# EAGLE board power-v3 (EAGLE 5.11)
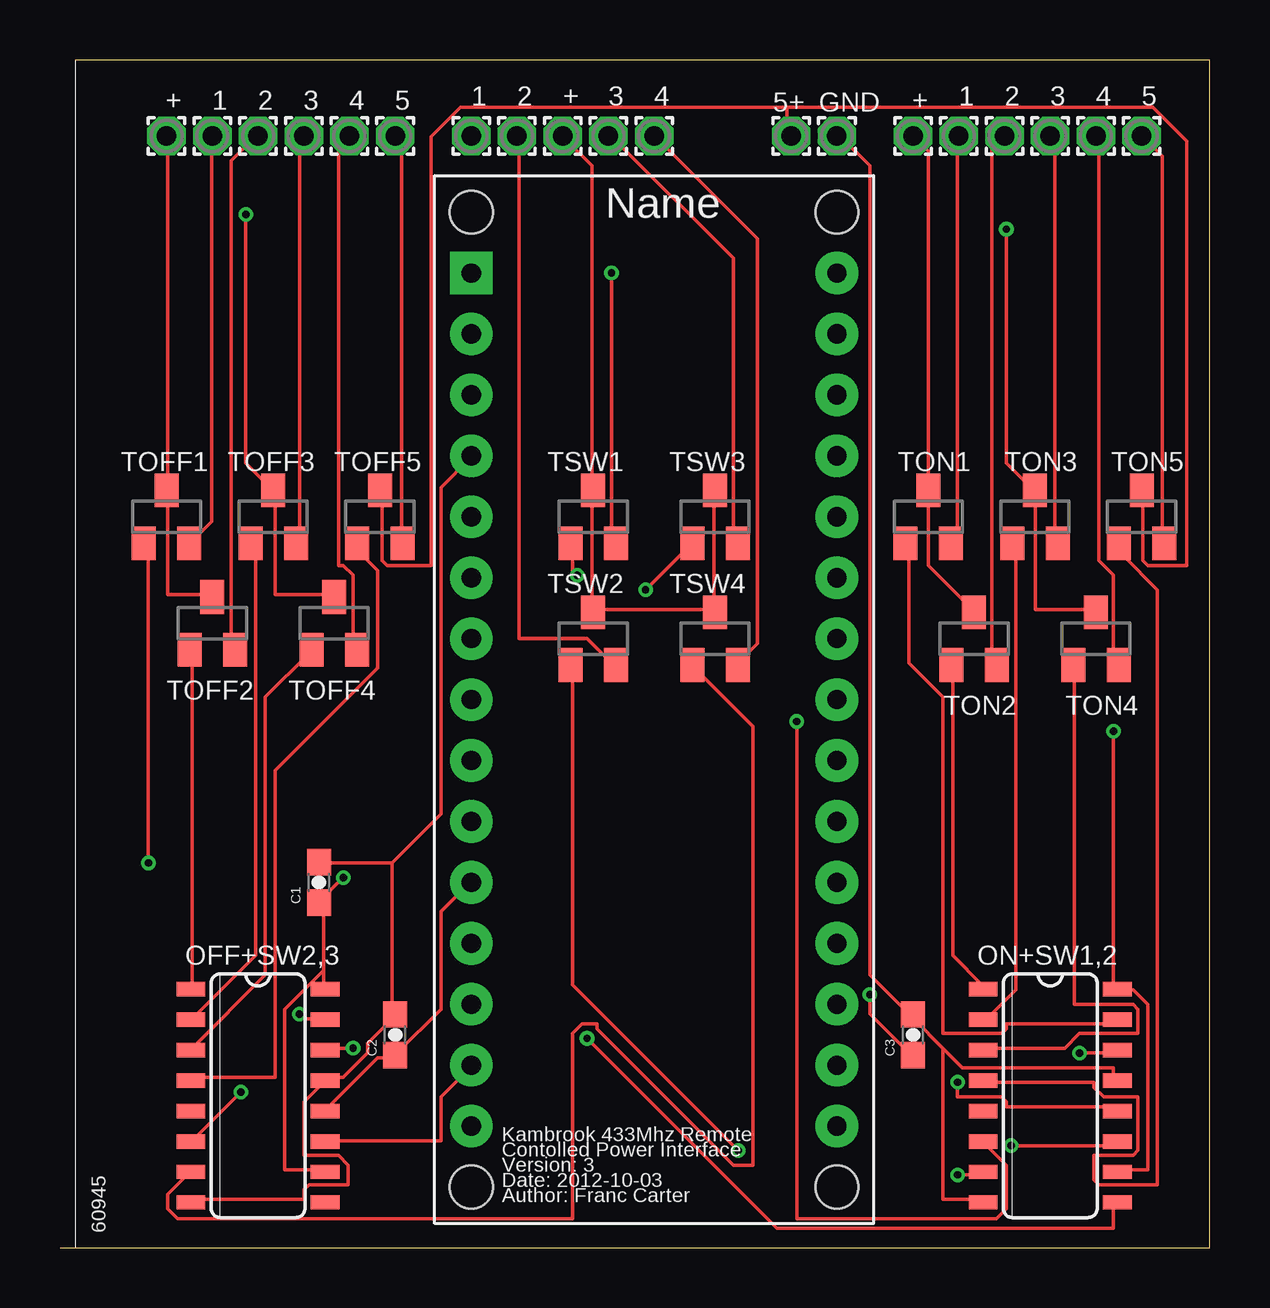
[diagram p0: board, top side]
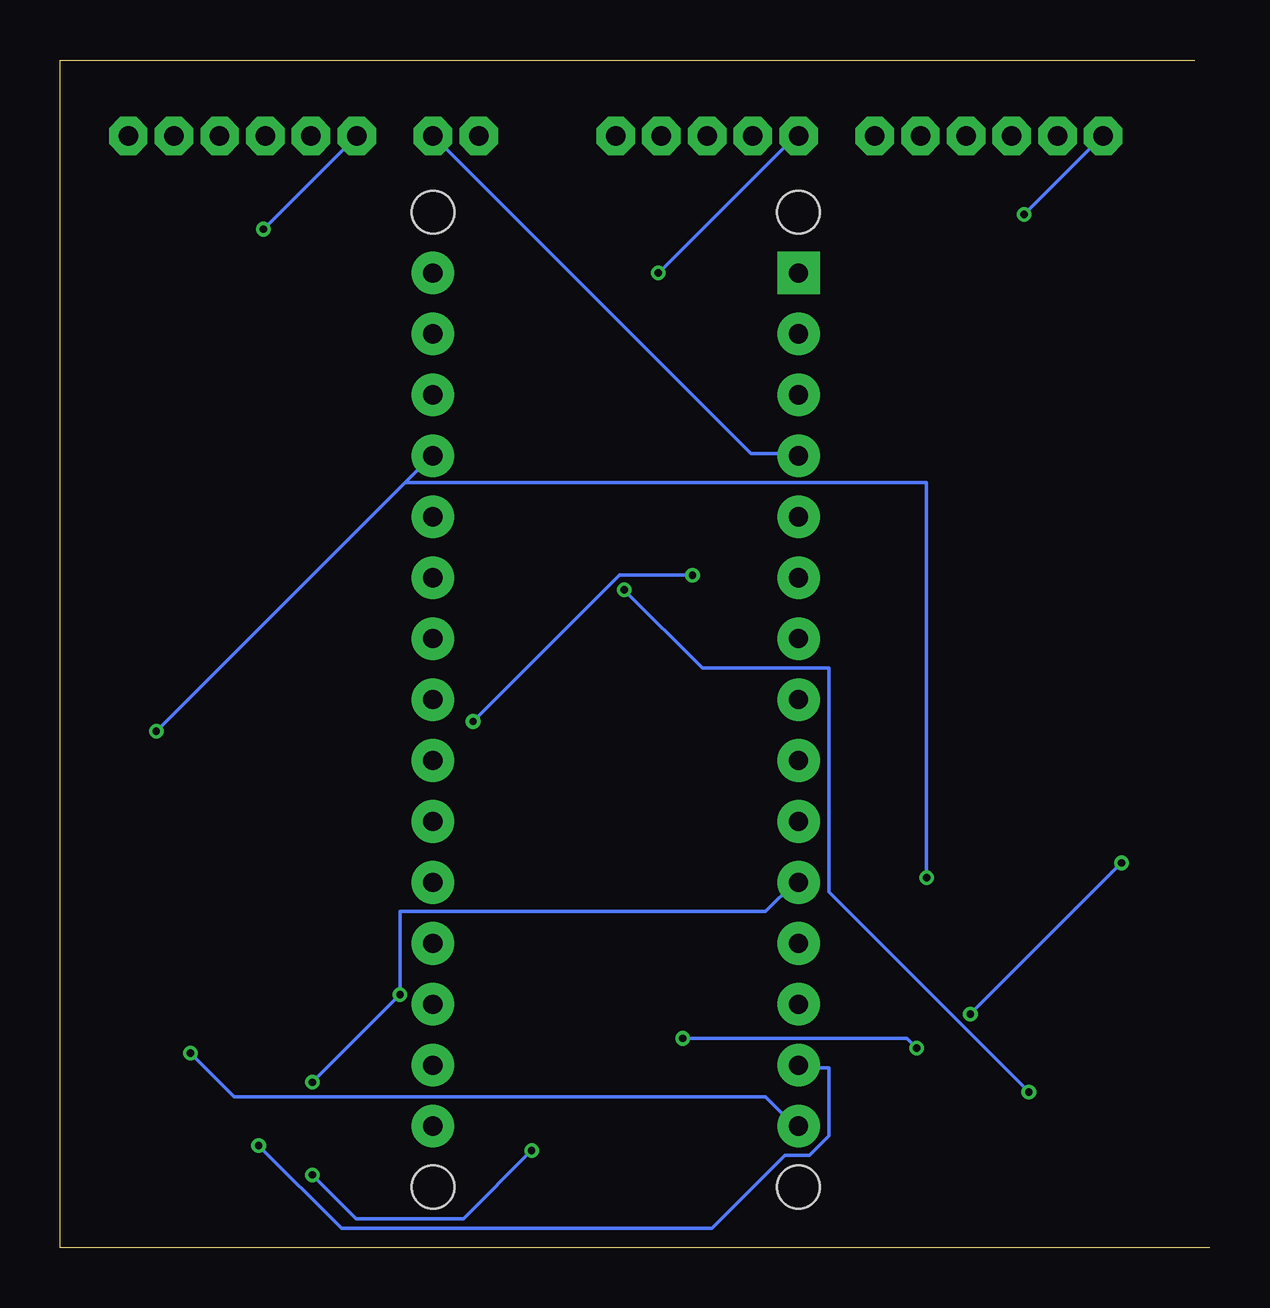
[diagram p1: board, bottom side, seen from below]

Size 47.93 x 49.52 mm. Coordinates in mm from the lower left corner, seen from the top.
Outline: 0,0 47.93,0 47.93,49.52 0.64,49.52
Copper layers (1*16): Top 0.035mm / dielectric 1.5mm / Bottom 0.035mm
Design rules "Fusion_eagle_rule_v1.1": minimum track width 6mil, minimum drill 12mil, track to track 6mil, track to pad 6mil, pad to pad 6mil, via to via 6mil, smd to smd 0mil, copper to edge 10mil, drill to drill 10mil, minimum pad ring 10mil, minimum via ring 6mil, stop-mask expansion 2mil, vias tented up to drill 100mil, thermal gap 10mil

## Footprints (pad centres in the part's own frame; a part is rotated, then mirrored left to right if it is on the bottom)
1,6/0,8 = drill 0.813 pad 1.6 octagon: 1 0,0
0603-CAP = smd 1.1 x 1: 1 -0.85,0; 2 0.85,0
PDIP-32 = drill 0.8 pad 1.778 round: 3V3 15.24,-35.56; +5V 15.24,-10.16; A0 15.24,-12.7; A1 15.24,-15.24; A2 15.24,-17.78; A3 15.24,-20.32; A4 15.24,-22.86; A5 15.24,-25.4; A6 15.24,-27.94; A7 15.24,-30.48; AREF 15.24,-33.02; D0/RX 0,-5.08; D2 0,-12.7; D3 0,-15.24; D4 0,-17.78; D5 0,-20.32; D6 0,-22.86; D7 0,-25.4; D8 0,-27.94; D9 0,-30.48; D10 0,-33.02; D11 0,-35.56; D12 0,-38.1; D13 15.24,-38.1; GND 0,-10.16; GND1 15.24,-5.08; RESET 0,-7.62; RESET1 15.24,-7.62; VIN 15.24,-2.54 | drill 0.8 pad 1.778 square: D1/TX 0,-2.54 | hole 1.778: 0,0; 0,-40.64; 15.24,-40.64; 15.24,0
SO16 = smd 0.6 x 1.2: 1 -4.445,-2.8; 2 -3.175,-2.8; 3 -1.905,-2.8; 4 -0.635,-2.8; 5 0.635,-2.8; 6 1.905,-2.8; 7 3.175,-2.8; 8 4.445,-2.8; 9 4.445,2.8; 10 3.175,2.8; 11 1.905,2.8; 12 0.635,2.8; 13 -0.635,2.8; 14 -1.905,2.8; 15 -3.175,2.8; 16 -4.445,2.8
SOT23 = smd 1 x 1.4: 1 -0.95,-1.1; 2 0.95,-1.1; 3 0,1.1

## Placement (x,y rotation side)
5+  [1,6/0,8]  30.48,46.35 0 top
C1  0.01uf  [0603-CAP]  10.79,15.24 90 top
C2  0.01uf  [0603-CAP]  13.97,8.89 90 top
C3  0.01uf  [0603-CAP]  35.56,8.89 90 top
GND  [1,6/0,8]  32.38,46.35 0 top
NANO  ARDUINONANO  [PDIP-32]  17.15,43.18 0 top
OFF1  [1,6/0,8]  6.35,46.35 0 top
OFF2  [1,6/0,8]  8.26,46.35 0 top
OFF3  [1,6/0,8]  10.16,46.35 0 top
OFF4  [1,6/0,8]  12.06,46.35 0 top
OFF5-  [1,6/0,8]  13.97,46.35 0 top
OFF+  [1,6/0,8]  4.45,46.35 0 top
OFF+SW2,3  74LS595D  [SO16]  8.26,6.35 270 top
ON1  [1,6/0,8]  37.46,46.35 0 top
ON2  [1,6/0,8]  39.37,46.35 0 top
ON3  [1,6/0,8]  41.27,46.35 0 top
ON4  [1,6/0,8]  43.18,46.35 0 top
ON5-  [1,6/0,8]  45.09,46.35 0 top
ON+  [1,6/0,8]  35.56,46.35 90 top
ON+SW1,2  74LS595D  [SO16]  41.27,6.35 270 top
SW1  [1,6/0,8]  17.15,46.35 0 top
SW2  [1,6/0,8]  19.05,46.35 0 top
SW3  [1,6/0,8]  22.86,46.35 0 top
SW4  [1,6/0,8]  24.77,46.35 0 top
SW+  [1,6/0,8]  20.96,46.35 0 top
TOFF1  [SOT23]  4.45,30.48 0 top
TOFF2  [SOT23]  6.35,26.04 0 top
TOFF3  [SOT23]  8.89,30.48 0 top
TOFF4  [SOT23]  11.43,26.04 0 top
TOFF5  [SOT23]  13.33,30.48 0 top
TON1  [SOT23]  36.2,30.48 0 top
TON2  [SOT23]  38.1,25.4 0 top
TON3  [SOT23]  40.64,30.48 0 top
TON4  [SOT23]  43.18,25.4 0 top
TON5  [SOT23]  45.09,30.48 0 top
TSW1  [SOT23]  22.23,30.48 0 top
TSW2  [SOT23]  22.23,25.4 0 top
TSW3  [SOT23]  27.31,30.48 0 top
TSW4  [SOT23]  27.31,25.4 0 top

## Library data of the parts
5+ GND OFF1-OFF4 OFF5- OFF+ ON1-ON4 ON5- ON+ SW1-SW4 SW+ = wirepad
C1-C3 OFF+SW2,3 ON+SW1,2 = SparkFun
NANO = MyNano
TOFF1-TOFF5 TON1-TON5 TSW1-TSW4 = semicon-smd-ipc

## Nets
CLK: NANO.D11 OFF+SW2,3.11 ON+SW1,2.11
CRY: OFF+SW2,3.14 ON+SW1,2.9
DATA: NANO.D12 ON+SW1,2.14
GND: C1.2 C2.2 C3.2 GND.1 NANO.GND OFF+SW2,3.8 OFF+SW2,3.13 ON+SW1,2.8 ON+SW1,2.13
LTCH: C2.1 C3.1 NANO.D8 OFF+SW2,3.12 ON+SW1,2.12
N$1: ON+.1 TON1.3 TON2.3 TON3.3 TON4.3
N$2: ON4.1 TON4.2
N$3: ON3.1 TON3.2
N$4: ON2.1 TON2.2
N$5: 5+.1 TOFF5.3 TON5.3
N$6: ON1.1 TON1.2
N$7: SW+.1 TSW1.3 TSW2.3 TSW3.3 TSW4.3
N$8: SW1.1 TSW1.2
N$9: SW2.1 TSW2.2
N$10: SW3.1 TSW3.2
N$11: ON5-.1 TON5.2
N$12: SW4.1 TSW4.2
N$21: OFF+.1 TOFF1.3 TOFF2.3 TOFF3.3 TOFF4.3
N$22: OFF1.1 TOFF1.2
N$23: OFF4.1 TOFF4.2
N$24: OFF3.1 TOFF3.2
N$25: OFF2.1 TOFF2.2
N$31: OFF5-.1 TOFF5.2
N$38: ON+SW1,2.5
N$46: OFF+SW2,3.5
N$49: OFF+SW2,3.9
OFF1: OFF+SW2,3.15 TOFF1.1
OFF2: OFF+SW2,3.1 TOFF2.1
OFF3: OFF+SW2,3.2 TOFF3.1
OFF4: OFF+SW2,3.3 TOFF4.1
OFF5: OFF+SW2,3.4 TOFF5.1
ON1: ON+SW1,2.15 TON1.1
ON2: ON+SW1,2.1 TON2.1
ON3: ON+SW1,2.2 TON3.1
ON4: ON+SW1,2.3 TON4.1
ON5: ON+SW1,2.4 TON5.1
SW1: ON+SW1,2.6 TSW1.1
SW2: ON+SW1,2.7 TSW2.1
SW3: OFF+SW2,3.6 TSW3.1
SW4: OFF+SW2,3.7 TSW4.1
VCC: C1.1 NANO.+5V OFF+SW2,3.10 OFF+SW2,3.16 ON+SW1,2.10 ON+SW1,2.16

## Tracks (layer width: path | path; a pad name or v marks a point on that pad's centre or on a via)
CLK  (via drill 0.3)
  Top 0.152: OFF+SW2,3.11 11.2,4.47 15.88,4.47 15.88,6.3 17.09,7.52 NANO.D11 | v39.65,4.27 43.92,4.27 ON+SW1,2.11
  Bottom 0.152: v39.65,4.27 36.2,0.81 20.75,0.81 17.7,3.86 16.69,3.86 15.88,4.67 15.88,7.52 17.09,7.52 NANO.D11
CRY  (via drill 0.3)
  Top 0.152: v12.22,8.33 11.2,8.33 OFF+SW2,3.14 | v21.97,8.74 29.9,0.81 43.92,0.81 43.92,1.83 ON+SW1,2.9
  Bottom 0.152: v12.22,8.33 12.62,8.74 v21.97,8.74
DATA  (via drill 0.3)
  Top 0.152: v42.49,8.13 43.92,8.13 ON+SW1,2.14
  Bottom 0.152: v42.49,8.13 40.66,6.3 18.52,6.3 17.3,5.08 NANO.D12
GND
  Top 0.152: 13.84,16.05 10.79,16.05 C1.2 | 13.84,16.05 13.84,9.75 C2.2 13.84,9.55 12.83,8.53 12.83,8.13 11.81,7.11 11.2,7.11 OFF+SW2,3.13 11,6.91 10.19,6.1 10.19,3.86 11.61,3.86 12.01,3.45 12.01,2.64 10.39,2.64 10.19,2.44 10.19,2.03 5.51,2.03 OFF+SW2,3.8 | 36.8,8.33 37.62,7.52 43.92,7.52 43.92,7.11 ON+SW1,2.13 | 36.8,8.33 35.59,9.55 C3.2 35.38,9.75 33.76,11.38 33.76,45.11 32.54,46.33 GND.1 | 36.8,8.33 36.8,2.03 38.43,2.03 ON+SW1,2.8 | 13.84,16.05 15.88,18.09 15.88,31.7 17.09,32.92 NANO.GND
  Bottom 0.152: GND.1 32.33,46.33 19.13,33.12 17.3,33.12 NANO.GND
LTCH  (via drill 0.3)
  Top 0.152: OFF+SW2,3.12 11.2,5.89 13.23,7.92 13.84,7.92 C2.1 14.05,8.13 15.88,9.96 15.88,14.02 17.09,15.24 NANO.D8 | v33.76,10.57 33.76,9.75 35.38,8.13 C3.1 | v37.41,6.91 37.41,6.3 39.24,6.3 39.45,6.1 39.45,5.89 43.92,5.89 ON+SW1,2.12
  Bottom 0.152: NANO.D8 17.3,15.24 18.52,14.02 33.76,14.02 v33.76,10.57 v37.41,6.91
N$1  (via drill 0.3)
  Top 0.152: TON4.3 43.1,26.62 40.66,26.62 40.66,31.5 TON3.3 40.46,31.7 39.45,32.72 v39.45,42.47 | TON2.3 38.02,26.62 36.2,28.45 36.2,31.5 TON1.3 36.2,31.7 36.2,45.72 35.59,46.33 ON+.1
  Bottom 0.152: v39.45,42.47 35.59,46.33 ON+.1
N$2
  Top 0.152: TON4.2 44.12,24.38 43.92,24.59 43.92,28.04 43.31,28.65 43.31,46.33 ON4.1
N$3
  Top 0.152: TON3.2 41.48,29.46 41.48,46.13 41.27,46.33 ON3.1
N$4
  Top 0.152: TON2.2 39.04,24.38 38.84,24.59 38.84,45.92 39.24,46.33 ON2.1
N$5
  Top 0.152: 30.3,47.55 16.69,47.55 15.47,46.33 15.47,28.45 13.64,28.45 13.44,28.65 13.44,31.5 TOFF5.3 | 30.3,47.55 30.3,46.53 5+.1 | 30.3,47.55 45.54,47.55 46.96,46.13 46.96,28.45 45.34,28.45 45.14,28.65 45.14,31.5 TON5.3
N$6
  Top 0.152: TON1.2 37.21,29.46 37.41,29.67 37.41,46.33 ON1.1
N$7
  Top 0.152: 27.25,26.62 22.38,26.62 TSW2.3 22.17,26.62 22.17,31.5 TSW1.3 22.17,31.7 22.17,45.11 20.96,46.33 SW+.1 | 27.25,26.62 TSW4.3 27.25,26.62 | 27.25,26.62 27.25,31.5 TSW3.3
N$8  (via drill 0.3)
  Top 0.152: v22.99,40.64 22.99,29.46 TSW1.2
  Bottom 0.152: v22.99,40.64 17.3,46.33 SW1.1
N$9
  Top 0.152: TSW2.2 22.99,24.38 21.97,25.4 19.13,25.4 19.13,46.33 SW2.1
N$10
  Top 0.152: TSW3.2 28.07,29.46 28.07,41.25 22.99,46.33 SW3.1
N$11
  Top 0.152: TON5.2 45.95,29.46 45.95,45.52 45.14,46.33 ON5-.1
N$12
  Top 0.152: TSW4.2 28.27,24.38 29.08,25.2 29.08,42.06 24.82,46.33 SW4.1
N$21  (via drill 0.3)
  Top 0.152: TOFF4.3 11.4,27.23 8.97,27.23 8.97,31.5 TOFF3.3 8.76,31.7 7.75,32.72 v7.75,43.08 | TOFF2.3 6.33,27.23 4.5,27.23 4.5,31.5 TOFF1.3 4.5,31.7 4.5,46.33 OFF+.1
  Bottom 0.152: v7.75,43.08 4.5,46.33 OFF+.1
N$22
  Top 0.152: TOFF1.2 5.51,29.46 6.33,30.28 6.33,46.33 OFF1.1
N$23
  Top 0.152: TOFF4.2 12.22,24.99 12.22,28.04 11.81,28.45 11.61,28.45 11.61,45.92 12.01,46.33 OFF4.1
N$24
  Top 0.152: TOFF3.2 9.98,29.46 9.98,46.33 OFF3.1
N$25
  Top 0.152: TOFF2.2 7.14,24.99 7.14,45.31 8.15,46.33 OFF2.1
N$31
  Top 0.152: TOFF5.2 14.25,29.46 14.25,46.13 14.05,46.33 OFF5-.1
OFF1  (via drill 0.3)
  Top 0.152: v9.98,9.75 9.98,9.55 11,9.55 OFF+SW2,3.15 | v3.68,16.05 3.68,29.26 TOFF1.1
  Bottom 0.152: v9.98,9.75 v3.68,16.05
OFF2
  Top 0.152: OFF+SW2,3.1 5.51,10.97 5.51,24.79 TOFF2.1
OFF3
  Top 0.152: OFF+SW2,3.2 5.51,9.55 8.15,12.19 8.15,29.06 7.95,29.26 TOFF3.1
OFF4
  Top 0.152: OFF+SW2,3.3 5.51,8.33 8.56,11.38 8.56,22.96 10.39,24.79 TOFF4.1
OFF5
  Top 0.152: OFF+SW2,3.4 5.51,7.11 8.97,7.11 8.97,19.91 13.23,24.18 13.23,28.25 12.42,29.06 12.42,29.26 TOFF5.1
ON1
  Top 0.152: ON+SW1,2.15 43.92,9.35 39.45,9.35 39.45,9.14 39.24,8.94 36.8,8.94 36.8,22.96 35.38,24.38 35.38,29.26 TON1.1
ON2
  Top 0.152: ON+SW1,2.1 38.43,10.97 37.21,12.19 37.21,24.18 TON2.1
ON3
  Top 0.152: ON+SW1,2.2 38.63,9.55 39.85,10.77 39.85,29.26 TON3.1
ON4
  Top 0.152: ON+SW1,2.3 38.63,8.33 41.88,8.33 42.49,8.94 44.93,8.94 44.93,9.96 44.73,10.16 42.29,10.16 42.29,24.18 TON4.1
ON5
  Top 0.152: ON+SW1,2.4 38.63,6.91 43.1,6.91 43.1,6.71 43.51,6.3 44.93,6.3 44.93,4.06 44.73,3.86 43.1,3.86 43.1,2.85 43.31,2.64 45.74,2.64 45.74,27.43 44.32,28.85 44.32,29.26 TON5.1
SW1  (via drill 0.3)
  Top 0.152: v30.71,21.95 30.71,1.22 39.04,1.22 39.45,1.63 39.45,3.45 38.63,4.27 ON+SW1,2.6 | v21.57,28.04 21.36,28.25 21.36,29.26 TSW1.1
  Bottom 0.152: v30.71,21.95 24.61,28.04 v21.57,28.04
SW2  (via drill 0.3)
  Top 0.152: v37.41,3.05 38.43,3.05 ON+SW1,2.7 | v28.27,4.06 21.36,10.97 21.36,24.18 TSW2.1
  Bottom 0.152: v37.41,3.05 35.59,1.22 31.12,1.22 v28.27,4.06
SW3  (via drill 0.3)
  Top 0.152: v7.54,6.5 5.51,4.47 OFF+SW2,3.6 | v24.41,27.43 26.24,29.26 TSW3.1
  Bottom 0.152: v7.54,6.5 15.88,14.83 15.88,24.18 21.16,24.18 v24.41,27.43
SW4
  Top 0.152: OFF+SW2,3.7 5.31,3.05 4.5,2.23 4.5,1.63 4.9,1.22 21.36,1.22 21.36,8.94 21.77,9.35 22.38,9.35 22.38,9.14 28.07,3.45 28.88,3.45 28.88,21.74 26.44,24.18 TSW4.1
VCC  (via drill 0.3)
  Top 0.152: 11,11.58 11,10.97 OFF+SW2,3.16 | 11,11.58 11,14.02 10.79,14.22 C1.1 10.79,14.43 v11.81,15.44 | 11,11.58 9.37,9.96 9.37,3.25 11,3.25 OFF+SW2,3.10 | ON+SW1,2.10 44.12,3.25 45.34,3.25 45.34,10.16 44.73,10.77 44.12,10.77 ON+SW1,2.16 43.92,10.97 v43.92,21.54
  Bottom 0.152: 33.55,31.9 v43.92,21.54 | 33.55,31.9 32.54,32.92 NANO.+5V | v11.81,15.44 11.81,31.9 33.55,31.9

## Text on the board
tNames: + | 1 | 2 | 3 | 4 | 5 | 1 | 2 | + | 3 | 4 | + | 1 | 2 | 3 | 4 | 5 | Contolled Power Interface | Kambrook 433Mhz Remote | Date: 2012-10-03 | Version: 3 | Author: Franc Carter | 60945